# Altium PCB board.PcbDoc
Units mm, origin at the board's own origin, x right, y up, seen from the top; angles counter-clockwise.
Board outline 38.5 x 50 mm, 2 copper layers (Top Layer, Bottom Layer); 49 components, 42 nets, 157 pads, 177 vias.
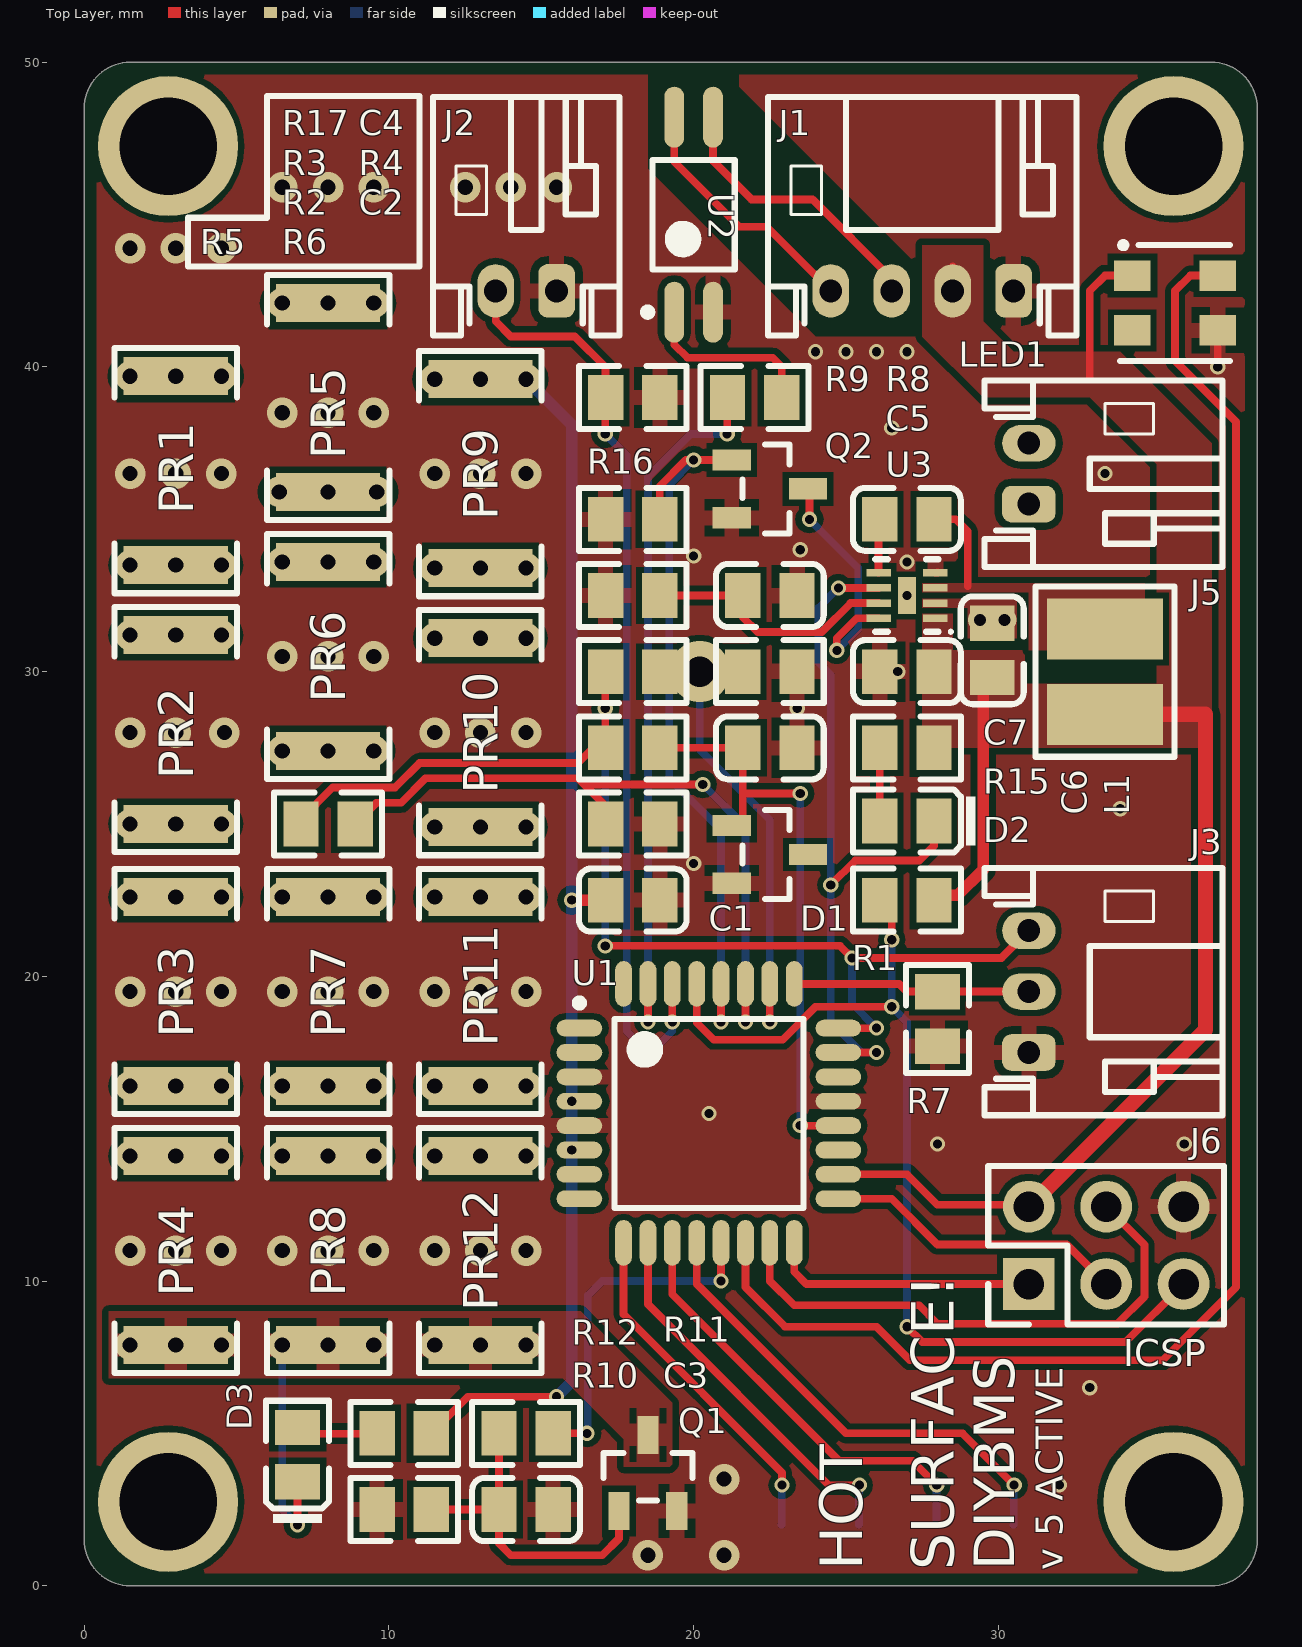
[diagram p0: Top Layer view]
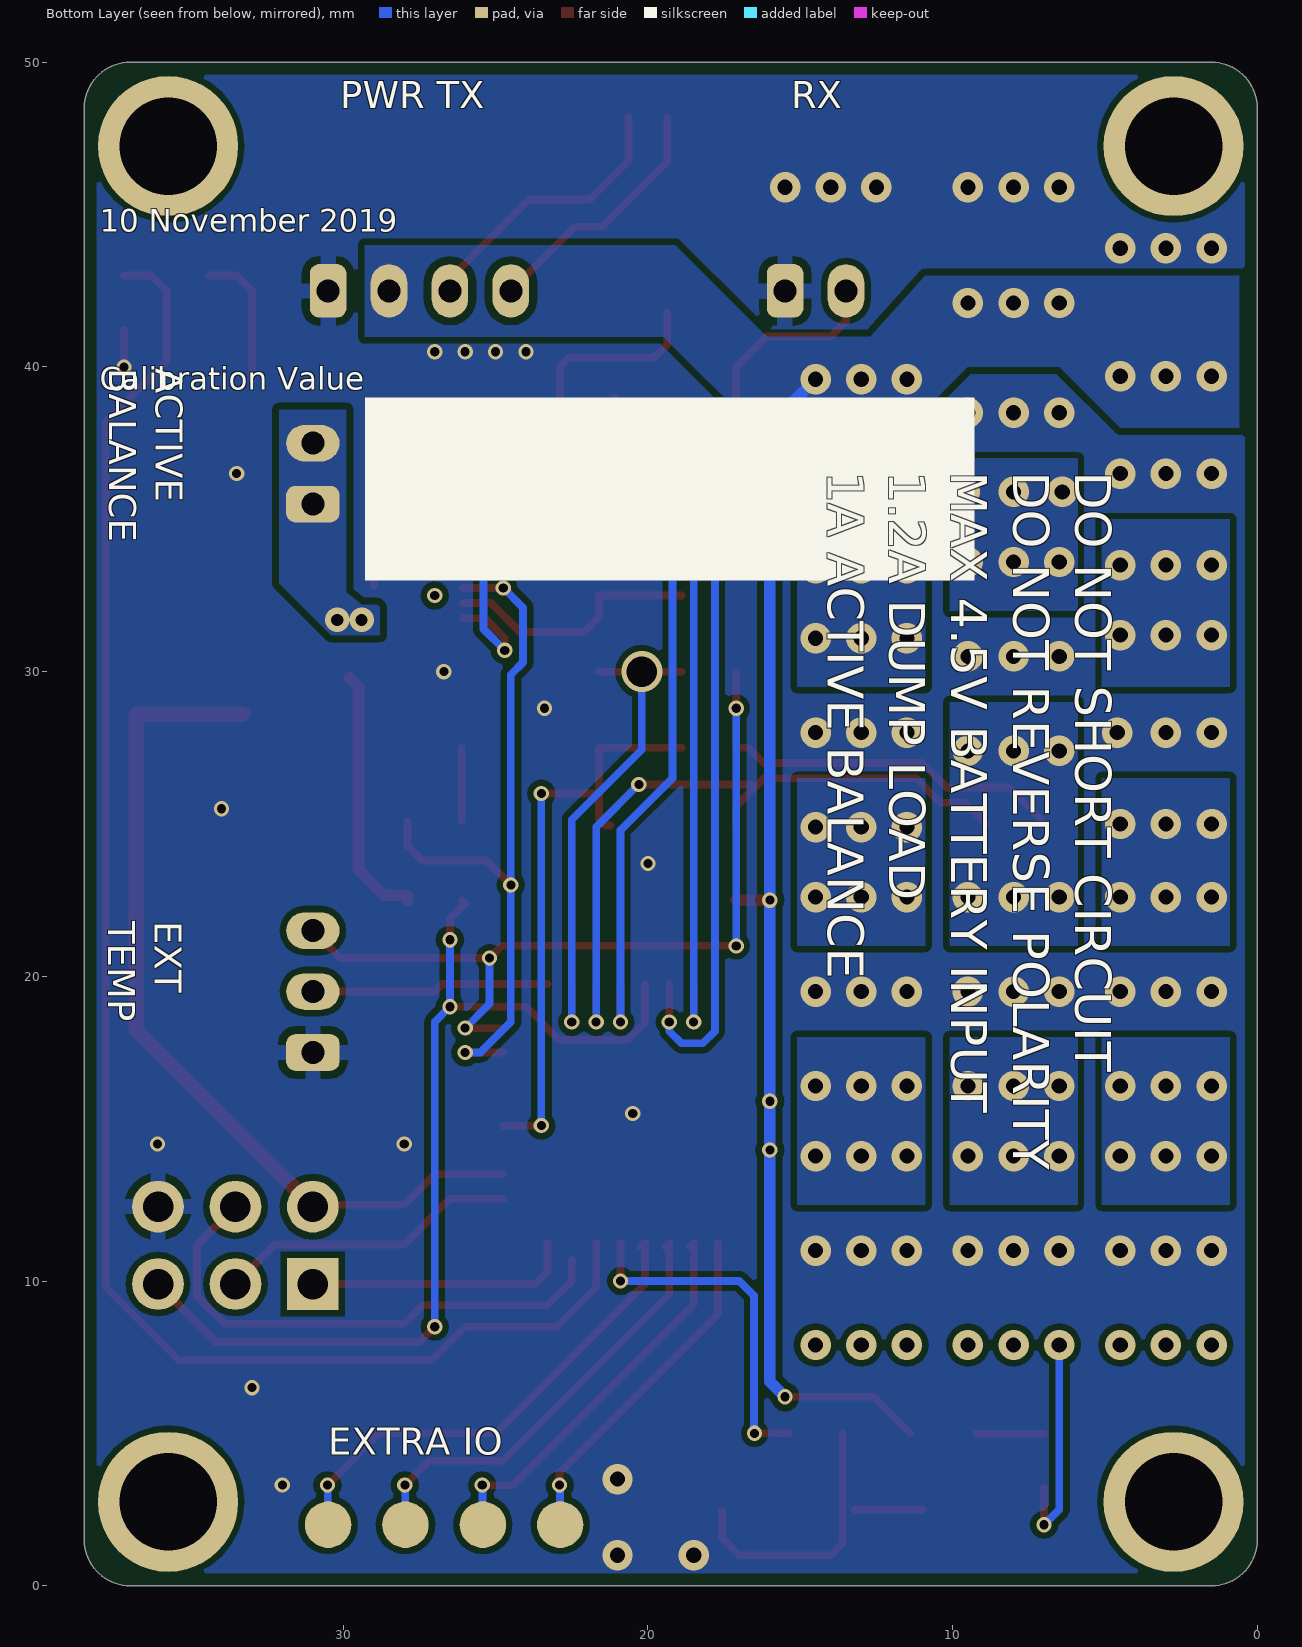
[diagram p1: Bottom Layer view, seen from below]
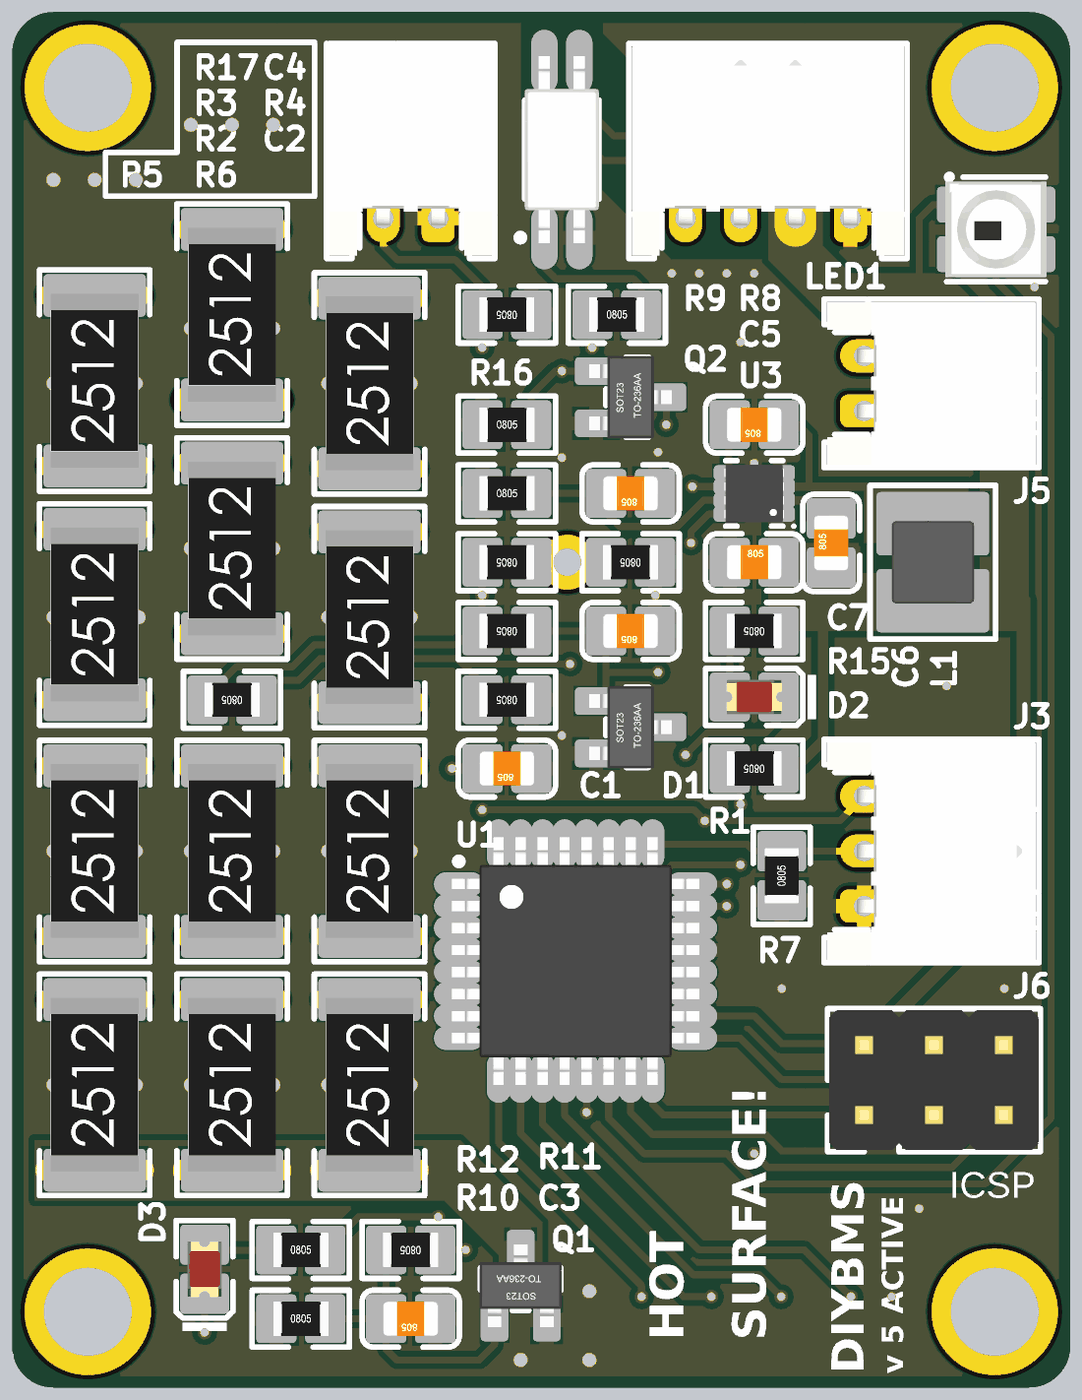
[diagram p2: 3D render of the assembled board from above, using the file's embedded part models]

## Layer stack, top to bottom
Top Solder: solder mask 0.0102, Solder Resist, Dk 3.5
Top Layer: signal copper 0.0356
Dielectric 1: dielectric 0.32, FR-4, Dk 4.8
Bottom Layer: signal copper 0.0356
Bottom Solder: solder mask 0.0102, Solder Resist, Dk 3.5

## Board outline
0,1.5 0,48.5 cw(c1.5,48.5) 1.5,50 37,50 cw(c37,48.5) 38.5,48.5 38.5,1.5 cw(c37,1.5) 37,0 1.5,0 cw(c1.5,1.5)

## Design rules (kind name [scope] priority, off if disabled: settings)
BoardOutlineClearance [All] p1: gap=0.4 ignorepadtopadclearanceinfootprint=FALSE
Clearance Clearance_VCC [InNet('VCC') vs InNet('GND')] p1: gap=0.229 ignorepadtopadclearanceinfootprint=FALSE
Clearance Clearance_BAT_POS [InNet('BAT_POS') vs InNet('GND')] p2: gap=0.229 ignorepadtopadclearanceinfootprint=FALSE
Clearance Clearance_TX_ISO [(InNet('NetJ1_3') OR InNet('NetJ1_4'))] p3: gap=0.254 ignorepadtopadclearanceinfootprint=FALSE
Clearance [All] p4: gap=0.203 ignorepadtopadclearanceinfootprint=FALSE
HoleSize [All] p1: absolutevalues=TRUE maxlimit=6.3 minlimit=0.2 maxpercent=80.000 minpercent=20.000
MinimumAnnularRing [All] p1: minimumring=0.076
MinimumSolderMaskSliver [All] p1: minsoldermaskwidth=0.152
PasteMaskExpansion [All] p1: expansion=0.152
PolygonConnect PolygonConnect_VCC [InNet('VCC') vs InNet('VCC')] p1: connectstyle=Direct reliefconductorwidth=0.254 reliefentries=4 polygonreliefangle="90 Angle" airgapwidth=0.254
PolygonConnect PolygonConnect_GND [InNet('GND')] p2: thpad.connectstyle=Relief thpad.reliefconductorwidth=0.508 thpad.reliefentries=4 thpad.polygonreliefangle="90 Angle" thpad.airgapwidth=0.254 smdpad.connectstyle=Relief smdpad.reliefconductorwidth=0.508 smdpad.reliefentries=4 smdpad.polygonreliefangle="90 Angle" smdpad.airgapwidth=0.254 via.connectstyle=Direct via.reliefconductorwidth=0.254 via.reliefentries=4 via.polygonreliefangle="90 Angle" via.airgapwidth=0.254
PolygonConnect PolygonConnect_BAT_POS [InNet('BAT_POS')] p3: connectstyle=Direct reliefconductorwidth=0.508 reliefentries=4 polygonreliefangle="90 Angle" airgapwidth=0.254
PolygonConnect PolygonConnect_SW [InNet('NetC5_1')] p4: connectstyle=Direct reliefconductorwidth=0.508 reliefentries=4 polygonreliefangle="90 Angle" airgapwidth=0.254
PolygonConnect PolygonConnect_BYPASS_GND [InNet('GND') vs HasFootprint('SOT-23(SOT-23-3)')] p5: thpad.connectstyle=Relief thpad.reliefconductorwidth=0.508 thpad.reliefentries=4 thpad.polygonreliefangle="90 Angle" thpad.airgapwidth=0.254 smdpad.connectstyle=Relief smdpad.reliefconductorwidth=0.508 smdpad.reliefentries=4 smdpad.polygonreliefangle="90 Angle" smdpad.airgapwidth=0.254 via.connectstyle=Direct via.reliefconductorwidth=0.254 via.reliefentries=4 via.polygonreliefangle="90 Angle" via.airgapwidth=0.254
PolygonConnect PolygonConnect_BYPASS [(InNet('NetD3_K') OR InNet('NetPR1_1') OR InNet('NetPR2_1') OR InNet('NetPR3_1') OR InNet('NetPR5_1') OR InNet('NetPR6_1') OR InNet('NetPR7_1') OR InNet('NetPR9_1') OR InNet('NetPR10_1') OR InNet('NetPR11_1'))] p6: thpad.connectstyle=Relief thpad.reliefconductorwidth=0.508 thpad.reliefentries=4 thpad.polygonreliefangle="45 Angle" thpad.airgapwidth=0.254 smdpad.connectstyle=Relief smdpad.reliefconductorwidth=0.762 smdpad.reliefentries=4 smdpad.polygonreliefangle="90 Angle" smdpad.airgapwidth=0.254 via.connectstyle=Direct via.reliefconductorwidth=0.254 via.reliefentries=4 via.polygonreliefangle="90 Angle" via.airgapwidth=0.254
PolygonConnect [All] p7: connectstyle=Relief reliefconductorwidth=0.254 reliefentries=4 polygonreliefangle="90 Angle" airgapwidth=0.254
RoutingVias [All] p1: holewidth=0.33 width=1.27 viastyle="Through Hole" minholewidth=0.2 minwidth=0.45 maxholewidth=0.16 maxwidth=1.27
SilkToSilkClearance [All] p1: silktosilkclearance=0.152
SilkToSolderMaskClearance [IsPad] p1: minsilkscreentomaskgap=0.152 clearancetoexposedcopper=TRUE
SolderMaskExpansion [All] p1: expansion=0.152
Width [All] p1: maxlimit=5.08 minlimit=0.127 preferedwidth=0.254
25 further rules are at their usual default settings.

## Classes and differential pairs
component class "[2] Bypass Balance": C3 C4 C5 C6 C7 D2 D3 J5 L1 PR1 PR2 PR3 PR4 PR5 PR6 PR7 PR8 PR9 PR10 PR11 PR12 Q1 Q2 R10 R11 R12 R15 R16 R17 U3
component class "[1] Controller": C1 C2 D1 J1 J2 J3 J6 LED1 R1 R2 R3 R4 R5 R6 R7 R8 R9 U1 U2

## Components (designator, comment, footprint, x,y, rotation, side; value= is the part's Value field where it differs from the comment)
C1 "100nF" 0805_C 18,22.5 r180 top
C2 "2.2uF" 0805_C 22.5,27.5 r180 top
C3 "10uF" 0805_C 14.5,2.5 r180 top
C4 "1nF" 0805_C 22.5,32.5 r180 top
C5 "10nF" 0805_C 27,35 r180 top
C6 "10uF" 0805_C 29.8,30.7 r90 top
C7 "10uF" 0805_C 27,30 r0 top
D1 "LM4040B-2.0" SOT-23(SOT-23-3) 22.5,24 r180 top
D2 "0805 Blue" 0805_LED_S1 27,25.1 r180 top
D3 "0805 Red" 0805_LED_S1 7,4.3 r90 top
J1 "JST PH 4POS 2.00mm" JST_PH_S4B 30.5,42.5 r180 top locked
J2 "JST PH 2POS 2.00mm" JST_PH_S2B 15.5,42.5 r180 top locked
J3 "JST PH 3POS 2.00mm" JST_PH_S3B 31,17.5 r90 top
J5 "JST PH 2POS 2.00mm" JST_PH_S2B 31,35.5 r90 top locked
J6 "AVR-ISP-6" PINHEADER_6POS_2ROW_2.54 31,9.9 r90 top
L1 "SM3521-1R0MT" 3521_L 33.5,30 r270 top
LED1 "WS2812B-Mini" LED3535_4P 35.8,42.1 r0 top
PR1 "2Ω ±1%" 2512_R 3,36.6 r90 top
PR2 "2Ω ±1%" 2512_R 3,28.1 r90 top
PR3 "2Ω ±1%" 2512_R 3,19.5 r90 top
PR4 "2Ω ±1%" 2512_R 3,11 r90 top
PR5 "2Ω ±1%" 2512_R 8,39 r90 top
PR6 "2Ω ±1%" 2512_R 8,30.5 r90 top
PR7 "2Ω ±1%" 2512_R 8,19.5 r90 top
PR8 "2Ω ±1%" 2512_R 8,11 r90 top
PR9 "2Ω ±1%" 2512_R 13,36.5 r90 top
PR10 "2Ω ±1%" 2512_R 13,28 r90 top
PR11 "2Ω ±1%" 2512_R 13,19.5 r90 top
PR12 "2Ω ±1%" 2512_R 13,11 r90 top
Q1 "IRLML6244TRPBF" SOT-23(SOT-23-3) 18.5,3.7 r270 top
Q2 "IRLML6244TRPBF" SOT-23(SOT-23-3) 22.5,36 r180 top
R1 "10KΩ ±1%" 0805_R 27,22.5 r180 top
R2 "1KΩ ±1%" 0805_R 18,27.5 r180 top
R3 "402KΩ ±1%" 0805_R 18,30 r180 top
R4 "510KΩ ±1%" 0805_R 22.5,30 r180 top
R5 "NCP21WB473J03RA" 0805_R 8,25 r180 top
R6 "47KΩ ±1%" 0805_R 18,25 r180 top
R7 "47KΩ ±1%" 0805_R 28,18.6 r90 top
R8 "510Ω ±1%" 0805_R 22,39 r0 top
R9 "47KΩ ±1%" 0805_R 18,39 r180 top
R10 "2.2KΩ ±1%" 0805_R 10.5,5 r0 top
R11 "510Ω ±1%" 0805_R 14.5,5 r180 top
R12 "47KΩ ±1%" 0805_R 10.5,2.5 r0 top
R15 "2.2KΩ ±1%" 0805_R 27,27.5 r180 top
R16 "47KΩ ±1%" 0805_R 18,35 r0 top
R17 "51KΩ ±1%" 0805_R 18,32.5 r0 top
U1 "ATmega168PA-AU" TQFP-32_7x7x08P 20.5,15.5 r0 top
U2 "HMHA2801" HMHA2801 20,45 r0 top
U3 "ETA3000D2L" DFN2x2-8L 27,32.5 r180 top

## Footprints (in the part's own frame and the unit in brackets; to place one, negate y for a bottom-side part, rotate by r counter-clockwise, add the part's x,y. Pads: shape width x height; smd on the part's side, far side on the other; paste and mask are expansions set on the pad)
0805_C [mm]
  rect 1.16x1.47 smd: 1(-0.89,0) 2(0.89,0)
  silkscreen extent -1.77,-1.04 1.77,1.04, body extent -1,-0.62 1,0.63, height 0.77
0805_LED_S1 [mm]
  rect 1.16x1.47 smd: A(0.89,0) K(-0.89,0)
  silkscreen extent -2.24,-1.04 1.77,1.03, body extent -1.01,-0.62 1.01,0.62, height 1.1
0805_R [mm]
  rect 1.16x1.47 smd: 1(-0.89,0) 2(0.89,0)
  silkscreen extent -1.77,-1.04 1.77,1.03, body extent -1,-0.62 1,0.63, height 0.49
2512_R [mm]
  rect 1.25x3.42 smd: 1(-3.1,0) 2(3.1,0)
  silkscreen extent -4.03,-2.01 4.02,2.01, body extent -3.16,-1.6 3.16,1.6, height 0.62
3521_L [mm]
  rect 2x3.8 smd: 1(-1.4,0) 2(1.4,0)
  silkscreen extent -2.79,-2.29 2.79,2.29, body extent -1.5,-1.5 1.5,1.5, height 2
DFN2x2-8L [mm]
  rect 0.8x0.25 smd: 1(-0.93,0.75) 2(-0.93,0.25) 3(-0.93,-0.25) 4(-0.93,-0.75) 5(0.93,-0.75) 6(0.93,-0.25) 7(0.93,0.25) 8(0.93,0.75)
  rect 0.6x1.2 smd: 9(0,0)
  silkscreen extent -1.49,-1.19 1.04,1.24, body extent -1.09,-1.04 1.09,1.04, height 0.8
HMHA2801 [mm]
  oval 0.65x2 smd: 1(-0.635,-3.2) 2(0.635,-3.2) 3(0.635,3.2) 4(-0.635,3.2)
  silkscreen extent -1.63,-3.32 1.35,1.8, body extent -1.35,-3.4 1.35,3.4, height 2.39
JST_PH_S2B [mm]
  rrect50% 1.2x1.75 hole 0.75: 1(0,0)
  oval 1.2x1.75 hole 0.75: 2(2,0)
  silkscreen extent -2.06,-6.36 4.06,1.46, body extent -1.95,-6.25 3.95,1.35, height 4.85
JST_PH_S3B [mm]
  rrect50% 1.2x1.75 hole 0.75: 1(0,0)
  oval 1.2x1.75 hole 0.75: 2(2,0) 3(4,0)
  silkscreen extent -2.06,-6.36 6.06,1.46, body extent -1.95,-6.25 5.95,1.35, height 4.85
JST_PH_S4B [mm]
  rrect50% 1.2x1.75 hole 0.75: 1(0,0)
  oval 1.2x1.75 hole 0.75: 2(2,0) 3(4,0) 4(6,0)
  silkscreen extent -2.06,-6.36 8.06,1.46, body extent -1.95,-6.25 7.95,1.35, height 4.85
LED3535_4P [mm]
  rect 1.2x1 smd: 1(-1.4,0.9) 2(-1.4,-0.9) 3(1.4,-0.9) 4(1.4,0.9)
  silkscreen extent -1.8,-1.9 1.8,2, body extent -1.84,-1.74 1.84,1.74, height 1.95
PINHEADER_6POS_2ROW_2.54 [mm]
  rect 1.7x1.7 hole 1: 1(0,0)
  round 1.7 hole 1: 2(2.54,0) 3(0,-2.54) 4(2.54,-2.54) 5(0,-5.08) 6(2.54,-5.08)
  silkscreen extent -1.33,-6.41 3.87,1.33, body extent -1.27,-6.35 3.81,1.27, height 8.54
SOT-23(SOT-23-3) [mm]
  rect 1.25x0.7 smd: 1(1.25,-0.95) 2(1.25,0.95) 3(-1.25,0)
  silkscreen extent -0.65,-1.46 0.9,1.46, body extent -1.5,-1.5 1.5,1.5, height 1.3
TQFP-32_7x7x08P [mm] "TQFP, 32-Leads, Body 7,00x7,00mm, Pitch 0,80mm, IPC Medium Density"
  oval 1.5x0.55 smd: 1(-4.25,2.8) 2(-4.25,2) 3(-4.25,1.2) 4(-4.25,0.4) 5(-4.25,-0.4) 6(-4.25,-1.2) 7(-4.25,-2) 8(-4.25,-2.8) 17(4.25,-2.8) 18(4.25,-2) 19(4.25,-1.2) 20(4.25,-0.4) 21(4.25,0.4) 22(4.25,1.2) 23(4.25,2) 24(4.25,2.8)
  oval 0.55x1.5 smd: 9(-2.8,-4.25) 10(-2,-4.25) 11(-1.2,-4.25) 12(-0.4,-4.25) 13(0.4,-4.25) 14(1.2,-4.25) 15(2,-4.25) 16(2.8,-4.25) 25(2.8,4.25) 26(2,4.25) 27(1.2,4.25) 28(0.4,4.25) 29(-0.4,4.25) 30(-1.2,4.25) 31(-2,4.25) 32(-2.8,4.25)
  silkscreen extent -4.37,-3.1 3.1,3.75, body extent -4.5,-4.5 4.5,4.5, height 1.2

## Part data
C1: library part "0805 100nF(104) 10% 50V", "Chip capacitors", Manufacturer=YAGEO, Package=0805, PartNumber=CC0805KRX7R9BB104, SuppliersPartNumber=C49678, Tolerance=10%, Voltage=50V, Capacitance=100nF, ComponentLink1Description="Supplier link", ComponentLink1URL=http://www.szlcsc.com/product/details_50686.html, Supplier=LC
C2: library part "0805 2.2uF (225) 20% 50V", "Chip capacitors", Manufacturer="Guangdong Fenghua Advanced Tech", Package=0805, PartNumber=0805F225M500NT, SuppliersPartNumber=C49217, Tolerance=20%, Voltage=50V, Capacitance=2.2uF, ComponentLink1Description="Supplier link", ComponentLink1URL=http://www.szlcsc.com/product/details_50225.html, Supplier=LC
C3 C6 C7: library part "0805 10uF (106) 10% 25V", "Chip capacitors", Manufacturer="Samsung Electro-Mechanics", Package=0805, PartNumber=CL21A106KAYNNNE, SuppliersPartNumber=C15850, Tolerance=10%, Voltage=25V, Capacitance=10uF, ComponentLink1Description="Supplier link", ComponentLink1URL=http://www.szlcsc.com/product/details_16532.html, Supplier=LC
C4: library part "0805 1nF (102) 10% 50V", "Chip capacitors", Manufacturer="Samsung Electro-Mechanics", Package=0805, PartNumber=CL21B102KBCNNNC, SuppliersPartNumber=C46653, Tolerance=10%, Voltage=50V, Capacitance=1nF, ComponentLink1Description="Supplier link", ComponentLink1URL=http://www.szlcsc.com/product/details_52223.html, Supplier=LC
C5: library part "0805 10nF (103) 10% 50V", "Chip capacitors", Manufacturer="Samsung Electro-Mechanics", Package=0805, PartNumber=CL21B103KBANNNC, SuppliersPartNumber=C1710, Tolerance=10%, Voltage=50V, Capacitance=10nF, ComponentLink1Description="Supplier link", ComponentLink1URL=http://www.szlcsc.com/product/details_2062.html, Supplier=LC
D1: "Precision Shunt Voltage Reference"
D2: library part "0805 LED Blue", "LED", Color=Blue, Package=0805, SuppliersPartNumber=C2293, ComponentLink1Description=?????, ComponentLink1URL=http://www.szlcsc.com/product/details_2666.html, Supplier=LC
D3: library part "0805 LED Red", "LED", Color=Red, Manufacturer="Foshan NationStar Optoelectronics", Package=0805, PartNumber=FC-2012HRK-620D, SuppliersPartNumber=C84256, ComponentLink1Description=?????, ComponentLink1URL=http://www.szlcsc.com/product/details_2668.html, Supplier=LC
J1: library part JST_PH_4POS, "JST-PH Conn", Manufacturer="JST Sales America", PartNumber=S4B-PH-K-S(LF)(SN), SuppliersPartNumber=C157926, ComponentLink1Description=Datasheet, ComponentLink1URL=https://datasheet.lcsc.com/szlcsc/1810261107_JST-Sales-America-S4B-PH-K-S-LF-SN_C157926.pdf, ComponentLink2Description="Supplier link", ComponentLink2URL=https://lcsc.com/product-detail/Wire-To-Board-Wire-To-Wire-Connector_JST-Sales-America-S4B-PH-K-S-LF-SN_C157926.html, Positions=3, Row=1, Supplier=LC, Type=Male
J2 J5: library part JST_PH_2POS, "JST-PH Conn", Manufacturer="JST Sales America", PartNumber=S2B-PH-K-S(LF)(SN), SuppliersPartNumber=C173752, ComponentLink1Description=Datasheet, ComponentLink1URL=https://datasheet.lcsc.com/szlcsc/JST-Sales-America-S2B-PH-K-S-LF-SN_C173752.pdf, ComponentLink2Description="Supplier link", ComponentLink2URL=https://lcsc.com/product-detail/Wire-To-Board-Wire-To-Wire-Connector_JST-Sales-America-S2B-PH-K-S-LF-SN_C173752.html, Positions=2, Row=1, Supplier=LC, Type=Male
J3: library part JST_PH_3POS, "JST-PH Conn", Manufacturer="JST Sales America", PartNumber=S3B-PH-K-S(LF)(SN), SuppliersPartNumber=C157929, ComponentLink1Description=Datasheet, ComponentLink1URL=https://datasheet.lcsc.com/szlcsc/1810261120_JST-Sales-America-S3B-PH-K-S-LF-SN_C157929.pdf, ComponentLink2Description="Supplier link", ComponentLink2URL=https://lcsc.com/product-detail/Wire-To-Board-Wire-To-Wire-Connector_JST-Sales-America_S3B-PH-K-S-LF-SN_JST-Sales-America-S3B-PH-K-S-LF-SN_C157929.html, Positions=3, Row=1, Supplier=LC, Type=Male
J6: library part AVR_ISP, Manufacturer="Boom Precision Elec", PartNumber=C65114, Positions=6, Row=2, Supplier=LC, SuppliersPartNumber=C65114, Type=Male
L1: library part "3521 1uH 20%", "Power Inductor", Current=2.2A, Inductance=1uH, Manufacturer="Shun Xiang Nuo Elec", Package=3521, SuppliersPartNumber=C55366, Tolerance=20%, ComponentLink1Description="Supplier link", ComponentLink1URL=https://lcsc.com/product-detail/Power-Inductors_Shun-Xiang-Nuo-Elec-SM3521-1R0MT_C55366.html, PartNumber=SM3521-1R0MT, Supplier=LC
LED1: "RGB Addressable LED", Manufacturer=Worldsemi, Package=3535, SuppliersPartNumber=C114583, ComponentLink1Description="Supplier link", ComponentLink1URL=https://lcsc.com/product-detail/Light-Emitting-Diodes-LED_Worldsemi-WS2812B-Mini_C114583.html, PartNumber=WS2812B-Mini, Supplier=LC
PR1 PR2 PR3 PR4 PR5 PR6 PR7 PR8 PR9 PR10 PR11 PR12: library part "2512 2R (2R00) 1%", "Chip resistor", Manufacturer="Uniroyal Elec", Package=2512, PartNumber=25121WF200KT4E, Power=1W, Resistance=2O, SuppliersPartNumber=C49298, Tolerance=1%, ComponentLink1Description="Supplier link", ComponentLink1URL=https://lcsc.com/product-detail/Chip-Resistor-Surface-Mount_Uniroyal-Elec-25121WF200KT4E_C49298.html, Supplier=LC
Q1 Q2: library part IRLML6244, "MOSFET-N", Manufacturer="Infineon Technologies", Package=SOT-23(SOT-23-3), SuppliersPartNumber=C143946, ComponentLink1Description="Supplier Link", ComponentLink1URL=https://lcsc.com/product-detail/MOSFET_Infineon-Technologies-IRLML6244TRPBF_C143946.html, PartNumber=IRLML6244TRPBF, Supplier=LC
R1: library part "0805 10K (1002) 1%", "Chip resistor", Manufacturer="Uniroyal Elec", Package=0805, PartNumber=0805W8F1002T5E, Power=1/8W, Resistance=10KO, SuppliersPartNumber=C17414, Tolerance=1%, ComponentLink1Description="Supplier link", ComponentLink1URL=http://www.szlcsc.com/product/details_18102.html, Supplier=LC
R2: library part "0805 1K (1001) 1%", "Chip resistor", Manufacturer="Uniroyal Elec", Package=0805, PartNumber=0805W8F1001T5E, Power=1/8W, Resistance=1KO, SuppliersPartNumber=C17513, Tolerance=1%, ComponentLink1Description="Supplier link", ComponentLink1URL=http://www.szlcsc.com/product/details_18201.html, Supplier=LC
R3: library part "0805 402K (4023) 1%", "Chip resistor", Manufacturer="Uniroyal Elec", Package=0805, PartNumber=0805W8F4023T5E, Power=1/8W, Resistance=402K, SuppliersPartNumber=C17680, Tolerance=1%, ComponentLink1Description="Supplier link", ComponentLink1URL=https://lcsc.com/product-detail/Chip-Resistor-Surface-Mount_Uniroyal-Elec-0805W8F4023T5E_C17680.html, Supplier=LC
R4: library part "0805 510K (5103) 1%", "Chip resistor", Manufacturer="Uniroyal Elec", Package=0805, PartNumber=0805W8F4023T5E, Power=1/8W, Resistance=510K, SuppliersPartNumber=C17733, Tolerance=1%, ComponentLink1Description="Supplier link", ComponentLink1URL=https://lcsc.com/product-detail/Chip-Resistor-Surface-Mount_Uniroyal-Elec-0805W8F5103T5E_C17733.html, Supplier=LC
R5: library part "0805 NTC 47K 5%", "NTC Resistor 47K 5%", B Tolerance=3%, Manufacturer="Murata Electronics", Package=0805, Power=1/5W, Resistance @25°C=47K, SuppliersPartNumber=C113141, Tolerance=5%, B0/50=4050K, ComponentLink1Description="Supplier link", ComponentLink1URL=https://lcsc.com/product-detail/NTC-Thermistors_Murata-Electronics-NCP21WB473J03RA_C113141.html, PartNumber=NCP21WB473J03RA, Supplier=LC
R6 R7 R9 R12 R16: library part "0805 47K (4702) 1%", "Chip resistor", Manufacturer="Uniroyal Elec", Package=0805, PartNumber=0805W8F4702T5E, Power=1/8W, Resistance=47KO, SuppliersPartNumber=C17713, Tolerance=1%, ComponentLink1Description="Supplier link", ComponentLink1URL=http://www.szlcsc.com/product/details_18401.html, Supplier=LC
R8 R11: library part "0805 510R (5100) 1%", "Chip resistor", Manufacturer="Uniroyal Elec", Package=0805, PartNumber=0805W8F5100T5E, Power=1/8W, Resistance=510O, SuppliersPartNumber=C17734, Tolerance=1%, ComponentLink1Description="Supplier link", ComponentLink1URL=http://www.szlcsc.com/product/details_18422.html, Supplier=LC
R10 R15: library part "0805 2.2K (2201) 1%", "Chip resistor", Manufacturer="Uniroyal Elec", Package=0805, PartNumber=0805W8F2201T5E, Power=1/8W, Resistance=2.2KO, SuppliersPartNumber=C17520, Tolerance=1%, ComponentLink1Description="Supplier link", ComponentLink1URL=http://www.szlcsc.com/product/details_18208.html, Supplier=LC
R17: library part "0805 51K (5102) 1%", "Chip resistor", Manufacturer="Uniroyal Elec", Package=0805, PartNumber=0805W8F5102T5E, Power=1/8W, Resistance=51KO, SuppliersPartNumber=C17737, Tolerance=1%, ComponentLink1Description="Supplier link", ComponentLink1URL=http://www.szlcsc.com/product/details_18425.html, Supplier=LC
U1: library part ATMEGA168, "ATmega AVR", Manufacturer="Microchip Tech", Package=TQFP-32_7x7x08P, PartNumber=ATMEGA168PA-AU, SuppliersPartNumber=C8728, ComponentLink1Description="Supplier Link", ComponentLink1URL=https://lcsc.com/product-detail/ATMEL-AVR_ATMEL_ATMEGA168PA-AU_ATMEGA168PA-AU_C8728.html, ComponentLink2Description=Datasheet, ComponentLink2URL=https://datasheet.lcsc.com/szlcsc/1809061822_Microchip-Tech-ATMEGA168PA-AU_C8728.pdf, Supplier=LC
U2: "Optocoupler", Manufacturer="ON Semicon", Package=SOIC-4, PartNumber=HMHA2801AR2, SuppliersPartNumber=C258257, ComponentLink1Description="Supplier Link", ComponentLink1URL=https://lcsc.com/product-detail/Optocouplers_ON-Semicon_HMHA2801AR2_ON-Semicon-ON-HMHA2801AR2_C258257.html, Supplier=LC
U3: library part ETA3000, "Inductive Cell Balancer IC", Manufacturer="ETA Solutions", Package=DFN2x2-8, ComponentLink1Description=Datasheet, ComponentLink1URL=https://www.google.com/url?sa=t&rct=j&q=&esrc=s&source=web&cd=1&cad=rja&uact=8&ved=2ahUKEwiT6tKR3dXlAhUi_CoKHWUtB6cQFjAAegQIARAC&url=http%3A%2F%2Fwww.etasolution.com%2Fupload%2F201905%2F09%2F201905091810050738.pdf&usg=AOvVaw3laEeLP183Kq2gxYTbdcOz, PartNumber=ETA3000D2L

## Free pads (board coordinates)
  round 1.524 smd far side: 2(22.88,2) 2(25.42,2) 2(27.96,2) 2(30.5,2)
  round 4.6 hole 3.2: M2(2.75,2.75) M2(2.75,47.25) M2(35.75,2.75) M2(35.75,47.25)

## Via types
v1: diameter 1, hole 0.5, Top Layer to Bottom Layer, tented bottom, 72 vias
v2: diameter 0.5, hole 0.3, Top Layer to Bottom Layer, tented both sides, 53 vias
v3: diameter 1, hole 0.5, Top Layer to Bottom Layer, tented both sides, 48 vias
v4: diameter 0.8, hole 0.4, Top Layer to Bottom Layer, tented bottom, 2 vias
v5: diameter 2/1.35 (per signal layer), hole 1, Top Layer to Bottom Layer, tented bottom, 1 vias
v6: diameter 0.5, hole 0.3, Top Layer to Bottom Layer, tented bottom, 1 vias

## Nets (pads, with @x,y where several pads share a name; then routed paths per layer and width w, separated by ;. In a path a pad name is that pad's centre, name@x,y a point inside that pad or via, vN(x,y) a via of type N, cw(c..) or ccw(c..) an arc to the next point about the centre after c; other vN are vias at no path point)
BAT_POS: C6.2 J5.1 J5.2 U3.2
  other v4: 29.4,31.7 30.2,31.7
D5: pad.2@22.88,2 U1.9 | length 11.4
  Top Layer w0.254: U1.9 17.7,8.906 22.9,3.706 v2(22.9,3.3)
  Bottom Layer w0.254: pad.2@22.88,2 22.89,2.01 22.89,3.29 v2(22.9,3.3)
D6: pad.2@25.42,2 U1.10 | length 12.9
  Top Layer w0.254: U1.10@18.627,11.123 U1.10 18.5,9.237 24.437,3.3 v2(25.44,3.3)
  Bottom Layer w0.254: pad.2@25.42,2 25.43,2.01 25.43,3.29 v2(25.44,3.3)
D7: pad.2@27.96,2 U1.11 | length 14.4
  Top Layer w0.254: U1.11@19.427,11.123 U1.11 19.3,9.569 24.769,4.1 27.18,4.1 v2(27.98,3.3)
  Bottom Layer w0.254: pad.2@27.96,2 27.97,2.01 27.97,3.29 v2(27.98,3.3)
D8: pad.2@30.5,2 U1.12 | length 16
  Top Layer w0.254: U1.12@20.227,11.123 U1.12 20.1,9.9 25,5 28.82,5 v2(30.52,3.3)
  Bottom Layer w0.254: pad.2@30.5,2 30.51,2.01 30.51,3.29 v2(30.52,3.3)
EN_BALANCE: Q2.1 R16.2 U1.28 | length 24.6
  Top Layer w0.254: R16.2@18.9,34.99 R16.2 18.89,36.09 19.75,36.95 v2(20,36.95) Q2.1 ; v2(20.9,18.5) U1.28
  Bottom Layer w0.254: v2(20,36.95) 19.195,36.145 19.195,26.505 20.9,24.8 v2(20.9,18.5)
EN_BALANCE_T: Q2.3 U3.8 | length 8.3
  Top Layer w0.254: Q2.3 23.8,35.95 v2(23.8,35) ; v2(24.7,30.7) 24.7,31.1 25.35,31.75 U3.8
  Bottom Layer w0.254: v2(23.8,35) 25.4,33.4 25.4,31.4 v2(24.7,30.7)
EN_VREF: J3.3 R2.2 R3.2 R5.2 U1.24 | length 39.8
  Top Layer w0.254: R5.2 7.11,25.155 8.155,26.2 10.2,26.2 11,27 16.2,27 16.7,27.5 R2.2 17.1,27.51 v2(17.1,28.8) 17.1,29.99 R3.2 ; v2(17.1,21) 24.8,21 v2(25.2,20.6) 30.1,20.6 J3.3 ; U1.24 v2(26,18.3)
  Bottom Layer w0.254: v2(17.1,21) v2(17.1,28.8) ; v2(25.2,20.6) 25.2,19.1 v2(26,18.3)
GND: C1.1 C2.1 C3.1 C4.1 C7.1 D1.2 J1.1 J2.1 J3.1 J6.6 LED1.3 Q1.2 Q2.2 R4.1 R6.1 R7.1 R9.1 R12.1 R16.1 R17.1 U1.3 U1.5 U1.21 U2.2 U3.4 | length 1.3
  Top Layer w0.254: U3.4 27.998,33.25 U3.4@28,33.252 ; v2(37.2,40) LED1.3
  other v2: 32,3.3 33,6.5 28,14.5 36.1,14.5 20.5,15.5 20,23.7 34,25.5 23.4,28.8 26.7,30 27,33.6 20,33.8 23.5,34 33.5,36.5 26.5,38 24,40.5 25,40.5 26,40.5 27,40.5
  other v3: 18.5,1 21,1 21,3.5 1.5,11 3,11 4.5,11 6.5,11 8,11 9.5,11 11.5,11 13,11 14.5,11 1.5,19.5 3,19.5 4.5,19.5 6.5,19.5 8,19.5 9.5,19.5 11.5,19.5 13,19.5 14.5,19.5 1.5,28 3,28 4.6,28 11.5,28 13,28 14.5,28 6.5,30.5 8,30.5 9.5,30.5 1.5,36.5 3,36.5 4.5,36.5 11.5,36.5 13,36.5 14.5,36.5 6.5,38.5 8,38.5 9.5,38.5 1.5,43.9 3,43.9 4.5,43.9 6.5,45.9 8,45.9 9.5,45.9 12.5,45.9 14,45.9 15.5,45.9
IS_BAL: D2.K U1.23 U3.6 | length 23.9
  Top Layer w0.254: v2(24.5,23) 25.3,23.8 27.4,23.8 27.89,24.29 D2.K ; U1.23 v2(26,17.5) ; v2(24.75,32.75) U3.6
  Bottom Layer w0.254: v2(24.75,32.75) 24.1,32.1 24.1,30.3 24.5,29.9 v2(24.5,23) 24.5,18.5 25.5,17.5 v2(26,17.5)
ISP_MISO: J6.1 U1.16 | length 8.8
  Top Layer w0.254: U1.16 23.3,10.3 23.7,9.9 J6.1
ISP_MOSI: J6.4 U1.15 | length 17.4
  Top Layer w0.254: U1.15@22.5,10.7 22.5,10 23.3,9.2 27.4,9.2 28,8.6 33.909,8.6 34.8,9.491 34.8,11.18 J6.4
ISP_SCK: J6.3 U1.17 | length 9.9
  Top Layer w0.254: U1.17 26.5,12.7 28,11.2 32.24,11.2 J6.3
NetC3_2: C3.2 Q1.1 R11.2 R12.2 | length 11.1
  Top Layer w0.254: R12.2@10.99,2.5 R12.2 C3.2@13.21,2.5 ; R11.2 C3.2 13.61,1.39 14,1 17,1 17.55,1.55 Q1.1
NetC4_2: C4.2 R17.2 U3.7 | length 8.5
  Top Layer w0.254: R17.2 C4.2 21.61,31.79 22.1,31.3 24.2,31.3 25.15,32.25 U3.7
NetC5_1: C5.1 L1.1 U3.3 | length 3.1
  Top Layer w0.254: C5.1 28.6,35 29,34.6 29,32.8
NetC5_2: C5.2 U3.5 | length 1.8
  Top Layer w0.254: U3.5 26.07,34.96 C5.2
NetD2_A: D2.A R15.2 | length 2.4
  Top Layer w0.254: D2.A R15.2
NetD3_A: D3.A R10.1 | length 2.2
  Top Layer w0.254: D3.A@7,4.99 9.2,4.99 R10.1@9.21,5
NetD3_K: D3.K PR4.1 PR8.1 PR12.1 Q1.3 | length 7.3
  Top Layer w0.254: v2(7,2) D3.K@7,3.21
  Bottom Layer w0.254: v1(6.5,7.9) 6.5,2.5 v2(7,2)
  other v1: 1.5,7.9 3,7.9 4.5,7.9 8,7.9 9.5,7.9 11.5,7.9 13,7.9 14.5,7.9
NetJ1_3: J1.3 U2.3 | length 9.3
  Top Layer w0.254: U2.3 20.635,46.765 21.9,45.5 23.9,45.5 26.5,42.9 J1.3
NetJ1_4: J1.4 U2.4 | length 8.4
  Top Layer w0.254: U2.4 19.365,46.735 21.5,44.6 22.4,44.6 24.044,42.956 24.063,42.956 24.5,42.519 J1.4
NetPR1_1: PR1.1 PR2.2
  other v1: 1.5,31.2 3,31.2 4.5,31.2 1.5,33.5 3,33.5 4.5,33.5
NetPR2_1: PR2.1 PR3.2
  other v1: 1.5,22.6 3,22.6 4.5,22.6 1.5,25 3,25 4.5,25
NetPR3_1: PR3.1 PR4.2
  other v1: 1.5,14.1 3,14.1 4.5,14.1 1.5,16.4 3,16.4 4.5,16.4
NetPR5_1: PR5.1 PR6.2
  other v1: 6.5,33.6 8,33.6 9.5,33.6 6.4,35.9 8,35.9 9.6,35.9
NetPR6_1: PR6.1 PR7.2
  other v1: 6.5,22.6 8,22.6 9.5,22.6 6.5,27.4 8,27.4 9.5,27.4
NetPR7_1: PR7.1 PR8.2
  other v1: 6.5,14.1 8,14.1 9.5,14.1 6.5,16.4 8,16.4 9.5,16.4
NetPR9_1: PR9.1 PR10.2
  other v1: 11.5,31.1 13,31.1 14.5,31.1 11.5,33.4 13,33.4 14.5,33.4
NetPR10_1: PR10.1 PR11.2
  other v1: 11.5,22.6 13,22.6 14.5,22.6 11.5,24.9 13,24.9 14.5,24.9
NetPR11_1: PR11.1 PR12.2
  other v1: 11.5,14.1 13,14.1 14.5,14.1 11.5,16.4 13,16.4 14.5,16.4
NetR8_2: R8.2 U2.1 | length 5.9
  Top Layer w0.254: U2.1 19.365,40.735 19.8,40.3 22.6,40.3 22.89,40.01 R8.2
PWM_LOAD: R11.1 U1.13 | length 11.5
  Top Layer w0.254: R11.1 v2(16.5,5) ; v2(20.9,10) U1.13
  Bottom Layer w0.254: v2(16.5,5) 16.521,5.021 16.521,9.521 17,10 v2(20.9,10)
R_SENSE: J3.2 R7.2 U1.25 | length 7.8
  Top Layer w0.254: U1.25 26.75,19.75 27,19.5 J3.2
RST: J6.5 R1.2 U1.29 | length 32.9
  Top Layer w0.254: U1.29 20.1,18.479 20.66,17.92 22.92,17.92 24,19 v2(26.5,19) ; R1.2 26,22.39 26.5,21.89 v2(26.5,21.2) ; v2(27,8.5) 27.5,8 34.18,8 J6.5
  Bottom Layer w0.254: v2(26.5,21.2) v2(26.5,19) 27,18.5 v2(27,8.5)
RXD: J2.2 R9.2 U1.30 | length 30.7
  Top Layer w0.254: J2.2 13.5,41.5 14,41 16.1,41 17.11,39.99 R9.2 17.1,38.99 v2(17.1,37.8) ; v2(19.3,18.5) U1.30
  Bottom Layer w0.254: v2(17.1,37.8) 17.8,37.1 17.8,18.2 18.2,17.8 18.9,17.8 19.3,18.2 v2(19.3,18.5)
ST_LED: LED1.4 U1.14 | length 54.7
  Top Layer w0.254: U1.14 21.7,9.8 23,8.5 26,8.5 27.1,7.4 35.4,7.4 37.8,9.8 37.8,38.2 35.8,40.2 35.8,42.5 36.3,43 LED1.4
T_SENSE: R5.1 R6.2 U1.27 | length 23.3
  Top Layer w0.254: R5.1 9.59,25.7 10.4,25.7 11.2,26.5 16.2,26.5 16.5,26.2 ; R6.2 17.11,25.59 16.5,26.2 ; v2(20.3,26.3) 16.6,26.3 16.5,26.2 ; v2(21.7,18.5) U1.27
  Bottom Layer w0.254: v2(20.3,26.3) 21.7,24.9 v2(21.7,18.5)
TXD: R8.1 U1.31 | length 23.5
  Top Layer w0.254: v2(18.5,18.5) U1.31 ; v2(21.1,37.8) 21.1,38.99 R8.1
  Bottom Layer w0.254: v2(18.5,18.5) 18.5,36.4 19.9,37.8 v2(21.1,37.8)
V_SENSE: R3.1 R4.2 U1.26 | length 16.4
  Top Layer w0.254: R3.1 v5(20.2,30) R4.2 ; v2(22.5,18.5) U1.26
  Bottom Layer w0.254: v5(20.2,30) 20.2,27.443 22.5,25.143 v2(22.5,18.5)
VCC: C1.2 C6.1 C7.2 J1.2 J6.2 L1.2 LED1.1 PR1.2 PR5.2 PR9.2 R1.1 R10.2 R15.1 U1.4 U1.6 U1.18 U3.1 | length 82.6
  Top Layer w0.254: R10.2 12.59,6.2 v2(15.5,6.2) ; U1.18 27,13.5 28,12.5 30.94,12.5 J6.2 ; J1.2 J1.2@28.5,43.3 ; 33,39.6 33,42.5 33.5,43 LED1.1
  Top Layer w0.381: v2(16,22.5) C1.2 ; R1.1 27.89,22.655 28.655,22.655 29.5,23.5 29.5,29.51 C6.1
  Top Layer w0.508: J6.2 36.8,18.24 36.8,28.6 L1.2 L1.2@33.3,28.6
  Bottom Layer w0.381: v1(14.5,39.6) 16,38.1 v2(16,22.5) v2(16,15.9) v2(16,14.3) 16,6.7 v2(15.5,6.2)
  other v1: 11.5,39.6 13,39.6 1.5,39.7 3,39.7 4.5,39.7 6.5,42.1 8,42.1 9.5,42.1
VREF: C2.2 D1.1 R2.1 U1.20 | length 19.5
  Top Layer w0.254: R2.1 C2.2 21.61,26 ; D1.1 21.387,24.95 21.61,25.173 21.61,26 ; v2(23.5,15.1) U1.20 ; v2(23.5,26) 21.61,26
  Bottom Layer w0.254: v2(23.5,15.1) v2(23.5,26)
pads on no net: D1.3 LED1.2 U1.1 U1.2 U1.7 U1.8 U1.19 U1.22 U1.32 U3.9
copper on no net:
  other v6: 27,32.5

## Polygon pours and split planes (outlines as drawn)
GND on Bottom Layer "GND_BOTTOM" (solid, pour order 40): 0,50 0,0 40,0 40,50
BAT_POS on Bottom Layer "BAT_POS_L02_P032" (solid, pour order 32): 29.9,38.6 32.1,38.6 32.1,32.9 30.4,31.2 28.8,31.2 28.8,32.2 29.4,32.2 29.9,32.6
VCC on Bottom Layer "VCC_L02_P036" (solid, pour order 36): 0.6,38 4.5,38 6.5,40 9.5,40 11.5,38 16.5,38 19.5,41 29.3,41 29.3,44 19.1,44 16.1,41 12.7,41 10.9,43 0.6,43
NetPR11_1 on Bottom Layer "NETPR11_1_L02_P020" (solid, pour order 20): 10.9,18 15.1,18 15.1,12.5 10.9,12.5
NetPR10_1 on Bottom Layer "NETPR10_1_L02_P022" (solid, pour order 22): 10.9,26.5 15.1,26.5 15.1,21 10.9,21
NetPR5_1 on Bottom Layer "NETPR5_1_L02_P026" (solid, pour order 26): 5.9,37 5.9,32 10.1,32 10.1,37
NetPR9_1 on Bottom Layer "NETPR9_1_L02_P028" (solid, pour order 28): 10.9,35 15.1,35 15.1,29.5 10.9,29.5
NetPR1_1 on Bottom Layer "NETPR1_1_L02_P014" (solid, pour order 14): 0.9,35 5.1,35 5.1,29.5 0.9,29.5
NetPR6_1 on Bottom Layer "NETPR6_1_L02_P030" (solid, pour order 30): 5.9,29 10.1,29 10.1,21 5.9,21
NetPR7_1 on Bottom Layer "NETPR7_1_L02_P018" (solid, pour order 18): 5.9,18 10.1,18 10.1,12.5 5.9,12.5
NetPR3_1 on Bottom Layer "NETPR3_1_L02_P016" (solid, pour order 16): 0.9,18 5.1,18 5.1,12.5 0.9,12.5
NetPR2_1 on Bottom Layer "NETPR2_1_L02_P012" (solid, pour order 12): 0.9,26.5 5.1,26.5 5.1,21 0.9,21
GND on Top Layer "GND_TOP" (solid, pour order 38): 40,0 40,50 0,50 0,0
NetD3_K on Top Layer "NETD3_K_L01_P004" (solid, pour order 4): 0.8,9 0.8,6.8 15.7,6.8 17.7,4.8 17.7,3.9 19.3,3.9 19.3,6 16.3,9
BAT_POS on Top Layer "BAT_POS_L01_P008" (solid, pour order 8): 27.5,32.4 30.6,32.4 30.6,31.1 29,31.1 29,32.1 27.5,32.1
VCC on Top Layer "VCC_L01_P010" (solid, pour order 10): 27.5,44 29.5,44 29.5,41.5 30.5,40.5 34,40.5 37,37.5 37,27.5 27.5,27.5 27.5,31.9 28.5,31.9 28.5,30.7 35.2,30.7 35.2,36.8 33,39 29.5,39 27.5,41
NetC5_1 on Top Layer "NETC5_1_L01_P000" (solid, pour order 0): 27.5,32.9 34.8,32.9 34.8,30.4 31,30.4 31,32.6 27.5,32.6
no net on Top Layer "Top Layer-No Net" (solid, pour order 2): 1.3,25.6

## Other copper
Top Layer:
  pour cut-out: 18.5,50 18.5,46.5 24,41 27.363,41 27.363,43.337 21.5,49.2 21.5,50
  pour cut-out: 30.863,30.7 35.2,30.7 35.2,29.6 30.863,29.6
  region: 3,25

## Silkscreen, mask and mechanical layers (free items; w line width, h text height)
Top Overlay:
  lines w0.2: 3.4,43.3 3.4,44.9 6,44.9 6,48.9 11,48.9 11,43.3 3.4,43.3
  text "ICSP" at 34.1,6.9 h1.52
  text "HOT" at 26,0.5 h2.4 r90
  text "SURFACE!" at 29,0.5 h2.4 r90
  text "DIYBMS" at 30.973,0.502 h2.29 r90
  text "v 5 ACTIVE" at 32.415,0.5 h1.52 r90
Bottom Overlay:
  rectangle: 9.28,33 29.28,39
  text "RX" at 15.3,48.2 h1.52
  text "PWR TX" at 30.1,48.2 h1.52
  text "10 November 2019" at 38,44.2 h1.27
  text "ACTIVE / BALANCE" at 37.976,39.952 h1.52 r90
  text "Calibration Value" at 38,39 h1.27
  text "DO NOT SHORT CIRCUIT / DO NOT REVERSE POLARITY / MAX 4.5V BATTERY INPUT / 1.2A DUMP LOAD / 1A ACTIVE BALANCE" at 14.5,36.562 h2.03 r90
  text "EXT / TEMP" at 38.008,21.8 h1.52 r90
  text "EXTRA IO" at 30.5,4 h1.52
Outline:
  the board outline again, w0.254
Mechanical 15:
  circle w0.254: c35.75,2.75 r3
  circle w0.254: c2.75,2.75 r3
  circle w0.254: c2.75,47.25 r3
  circle w0.254: c35.75,47.25 r3

## Dimensions
0,1.5 to 38.5,1.5 on Dimensions
1.5,0 to 1.5,50 on Dimensions